# Altium PCB MAIN.PcbDoc (part 1 of 2)
Units mm, origin at the board's own origin, x right, y up, seen from the top; angles counter-clockwise.
Board outline 40 x 35 mm, 2 copper layers (Top Layer, Bottom Layer); 40 components, 37 nets, 199 pads, 289 vias.
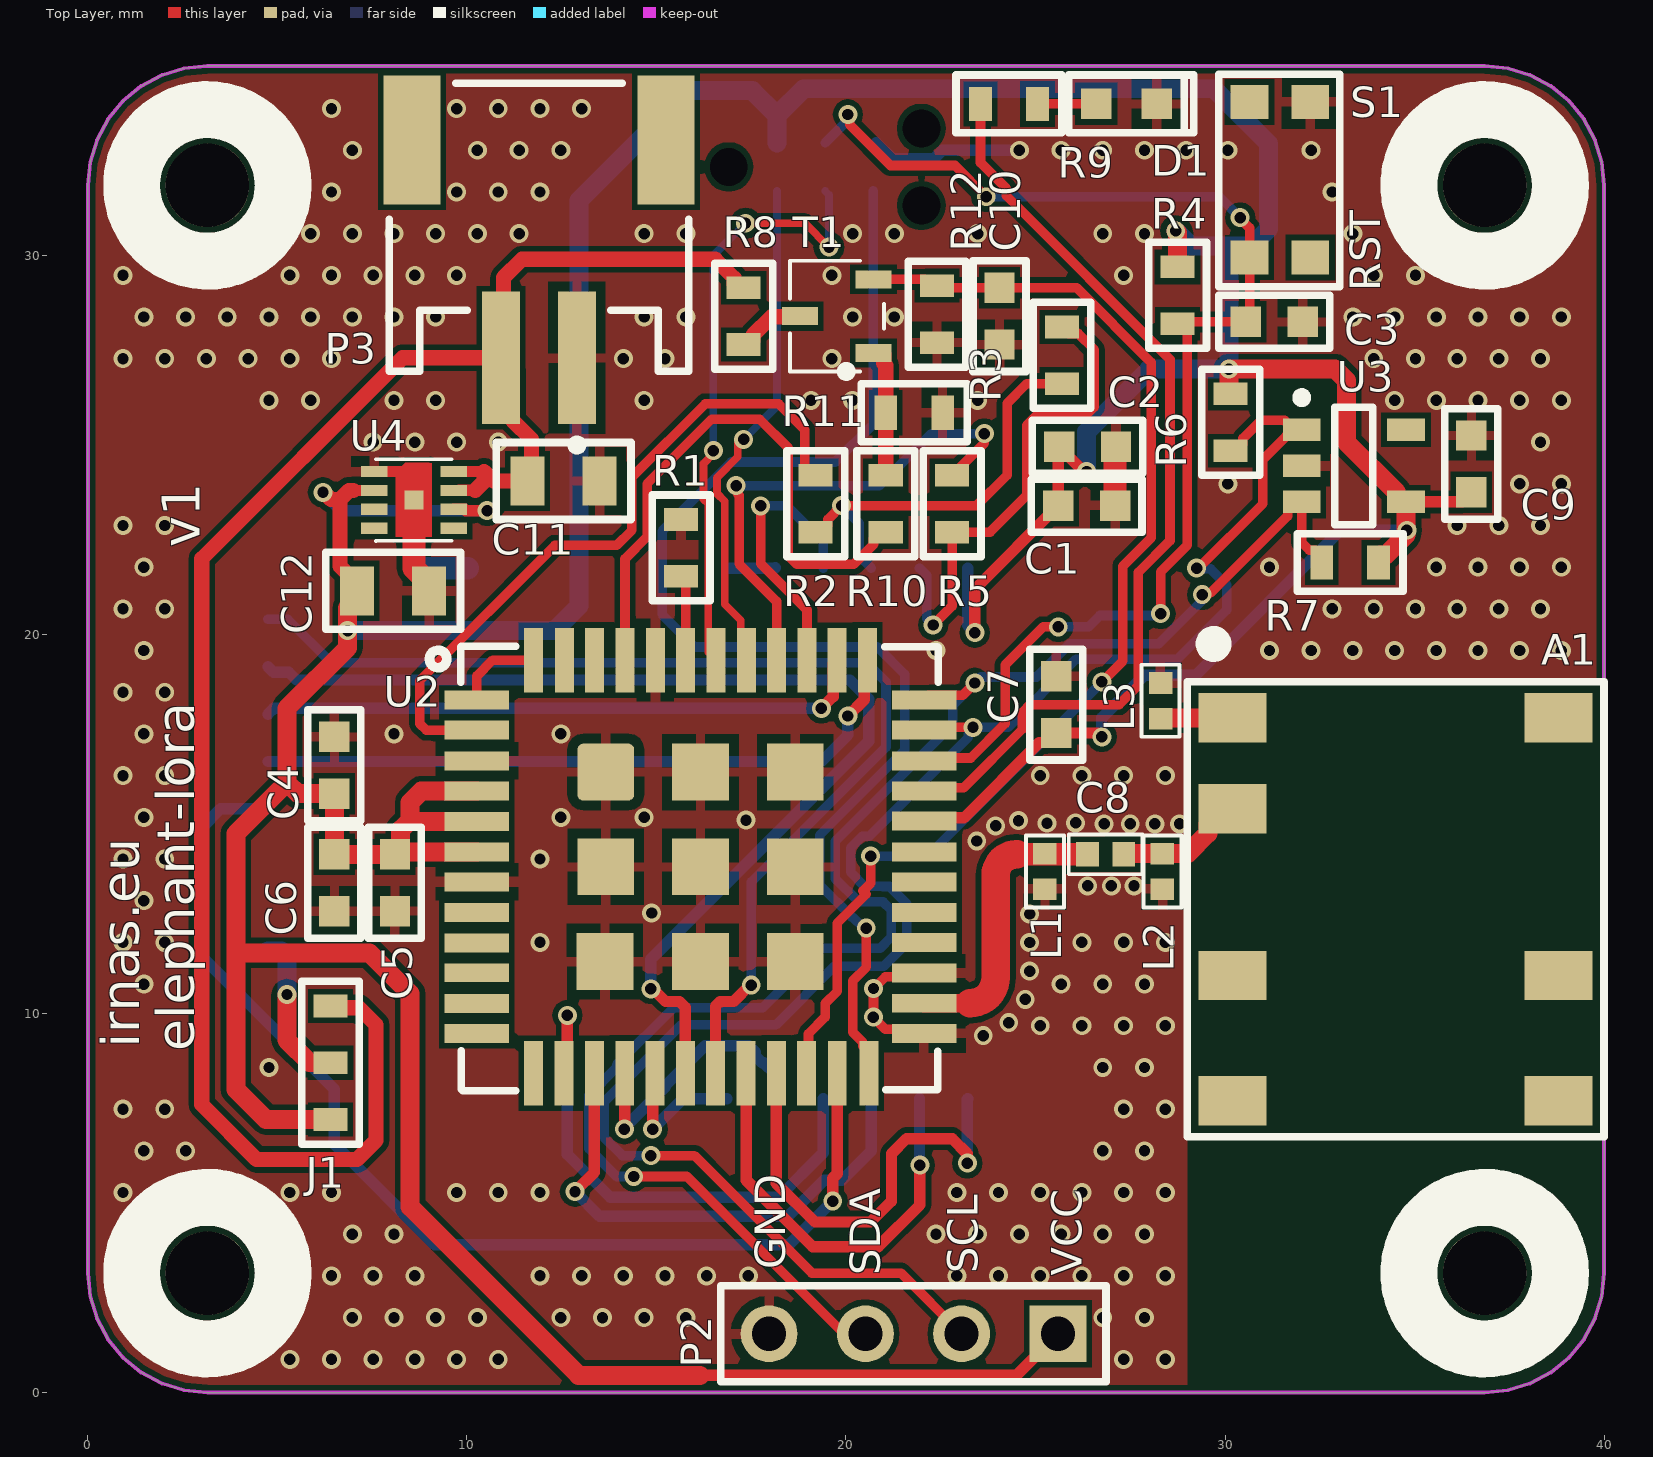
[diagram p0: Top Layer view]
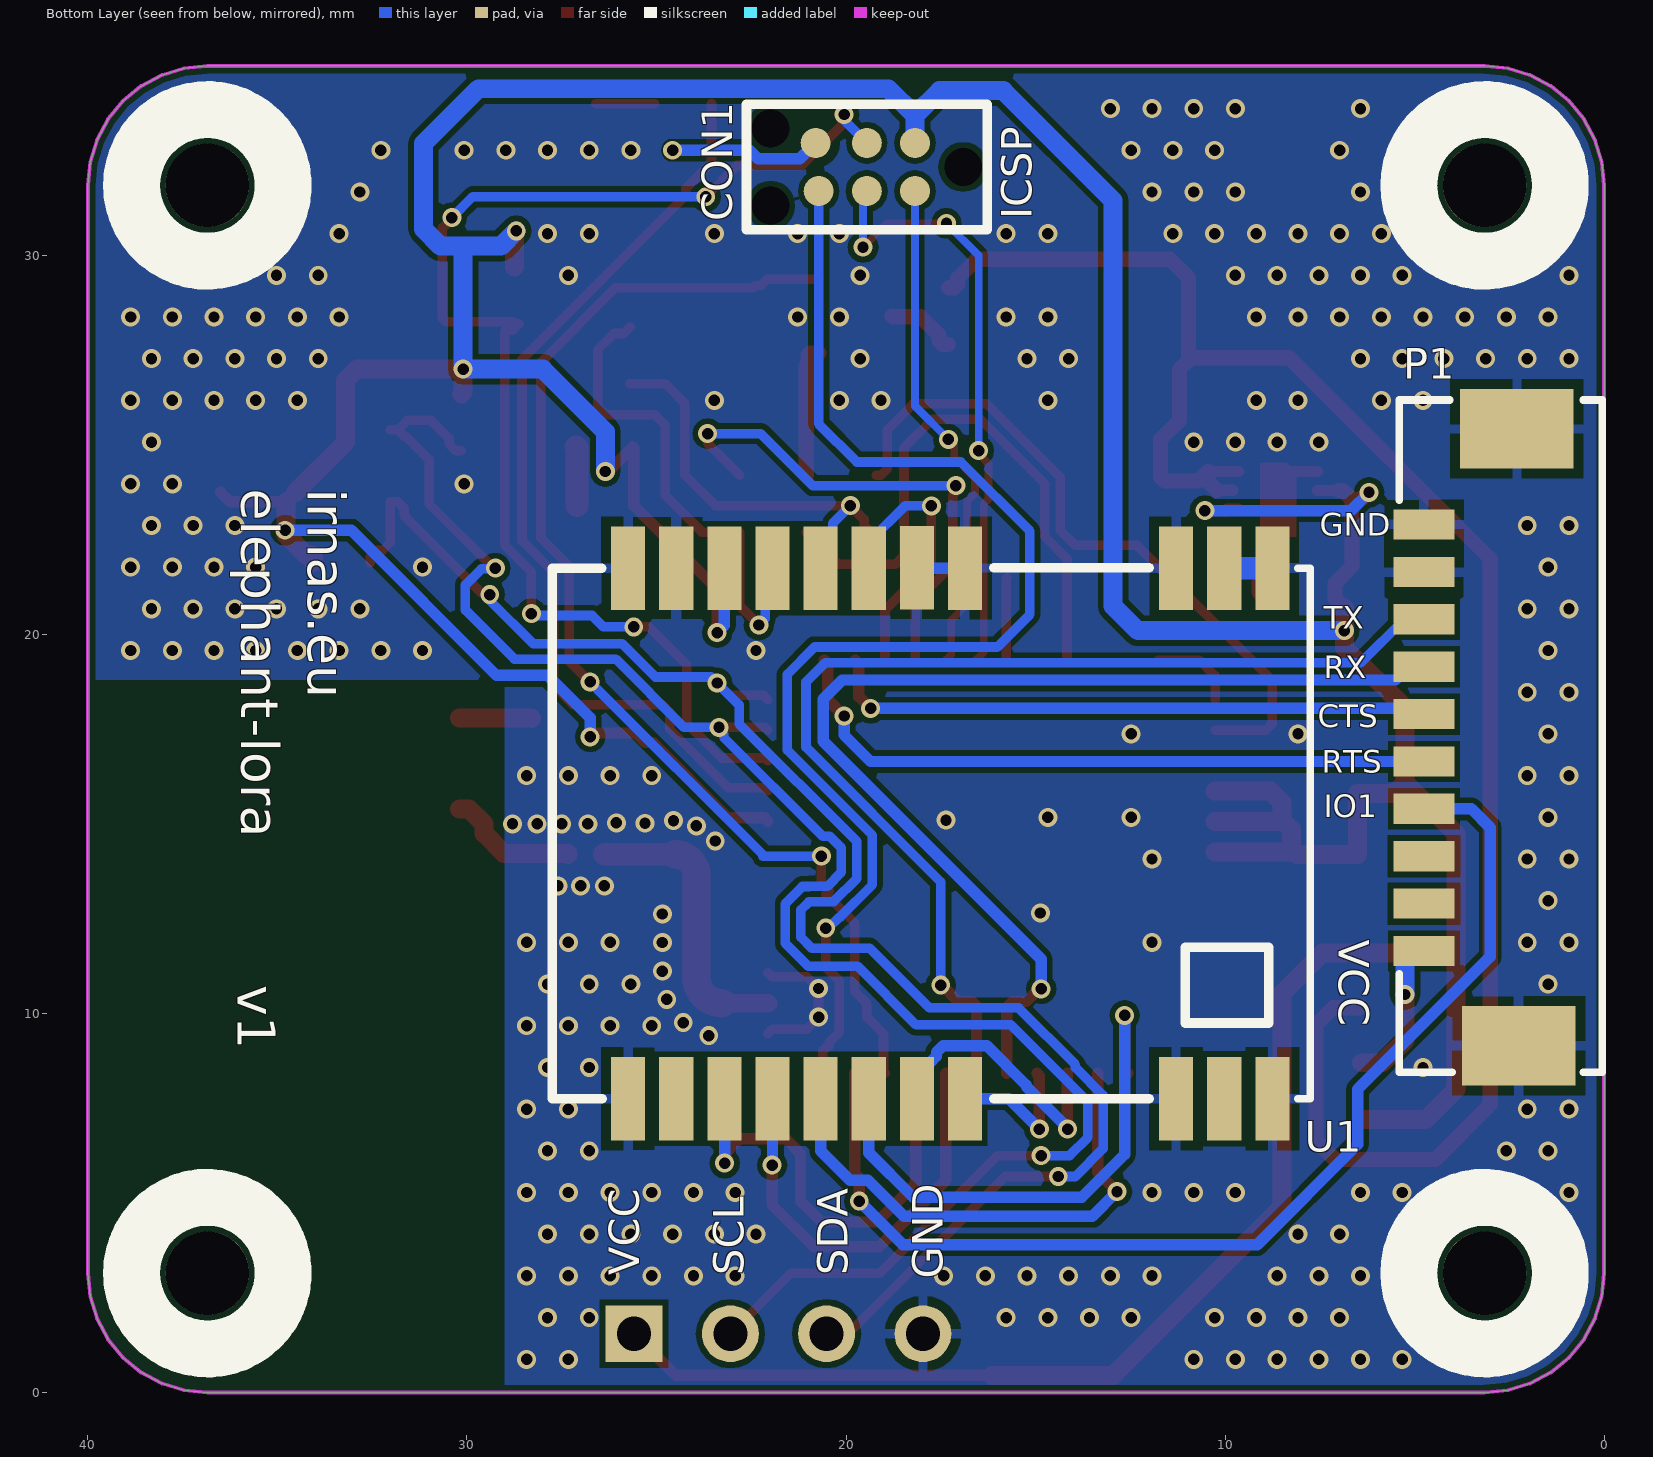
[diagram p1: Bottom Layer view, seen from below]

## Layer stack, top to bottom
Top Solder: solder mask 0.0102, Solder Resist, Dk 3.5
Top Layer: signal copper 0.0356
Dielectric 1: dielectric 0.32, FR-4, Dk 4.8
Bottom Layer: signal copper 0.0356
Bottom Solder: solder mask 0.0102, Solder Resist, Dk 3.5

## Board outline
40,31.852 39.94,32.466 39.76,33.057 39.469,33.601 39.078,34.078 38.601,34.469 38.057,34.76 37.466,34.939 36.852,35 3.148,35 2.534,34.939 1.943,34.76 1.399,34.469 0.922,34.078 0.531,33.601 0.24,33.057 0.06,32.466 0,31.852 0,3.148 0.06,2.534 0.24,1.943 0.531,1.399 0.922,0.922 1.399,0.53 1.943,0.239 2.534,0.06 3.148,0 36.852,0 37.466,0.06 38.057,0.239 38.601,0.53 39.078,0.922 39.469,1.399 39.76,1.943 39.94,2.534 40,3.148

## Design rules (kind name [scope] priority, off if disabled: settings)
Clearance Clearance_1 [InNamedPolygon('Top Layer-GND')] p1: gap=0.152 ignorepadtopadclearanceinfootprint=FALSE
Clearance [All] p2: gap=0.152 ignorepadtopadclearanceinfootprint=FALSE except(0.15: SMDPad-SMDPad)
ComponentClearance [All] p1: gap=0 collisioncheckmode=3 verticalgap=0 showdistances=FALSE
HoleSize [All] p1: absolutevalues=TRUE maxlimit=3 minlimit=0.3 maxpercent=80.000 minpercent=20.000
PolygonConnect [All] p1: thpad.connectstyle=Relief thpad.reliefconductorwidth=0.254 thpad.reliefentries=4 thpad.polygonreliefangle="90 Angle" thpad.airgapwidth=0.254 smdpad.connectstyle=Relief smdpad.reliefconductorwidth=0.254 smdpad.reliefentries=4 smdpad.polygonreliefangle="90 Angle" smdpad.airgapwidth=0.254 via.connectstyle=Direct via.reliefconductorwidth=0.254 via.reliefentries=4 via.polygonreliefangle="90 Angle" via.airgapwidth=0.254
RoutingVias [All] p1: holewidth=0.3 width=0.5 viastyle="Through Hole" minholewidth=0.3 minwidth=0.5 maxholewidth=0.3 maxwidth=0.5
SilkToSilkClearance [All] p1: silktosilkclearance=0
SilkToSolderMaskClearance [IsPad] p1: minsilkscreentomaskgap=0.152 clearancetoexposedcopper=TRUE
SolderMaskExpansion [All] p1: expansion=0.102
Width [All] p1: maxlimit=3 minlimit=0.203 preferedwidth=0.203
26 further rules are at their usual default settings.

## Components (designator, comment, footprint, x,y, rotation, side; value= is the part's Value field where it differs from the comment)
A1 "SR42I010-R" LORA_PCB_ANTENNA 34.5,12.75 r270 top
C1 "100nF" CAP0603 26.35,23.4 r180 top
C2 "1uF" CAP0603 26.374,24.95 r180 top
C3 "100nF" CAP0603 31.3,28.25 r180 top
C4 "10uF" CAP0603 6.5,16.55 r270 top
C5 "1uF" CAP0603 8.1,13.45 r90 top
C6 "100nF" CAP0603 6.5,13.45 r90 top
C7 "1uF" CAP0603 25.55,18.15 r270 top
C8 "2.2uF 6V3" CAP0402 26.85,14.2 r0 top
C9 "100nF" CAP0603 36.5,24.5 r270 top
C10 "10nF" CAP0603 24.05,28.4 r90 top
C11 "2.2uF" CAP0805 12.55,24.05 r180 top
C12 "2.2uF" CAP0805 8.05,21.15 r180 top
CON1 "Tag connect" TC2030-IDC-NL 16.91,32.335 r0 bottom
D1 "LED RED" LED0603 27.4,34 r180 top
J1 "Selector" Selector 6.4,8.7 r270 top
L1 "4.3nH" IND0402 25.25,13.75 r90 top
L2 "4.3nH" IND0402 28.35,13.75 r90 top
L3 "4.3nH" IND0402 28.3,18.25 r270 top
P1 "53261-1071" 53261-1071 3.5,17.287 r90 bottom
P2 "Header 4" HDR1X4 25.59,1.55 r180 top
P3 "S2B-PH-SM4-TB(LF)(SN)" "JST- S2B-PH-SM4-TB(LF)(SN)-2_V" 11.9,30.75 r180 top
R1 "10k" RES0603 15.65,22.284 r90 top
R2 "0R" RES0603 19.2,23.45 r90 top
R3 "0R" RES0603 25.7,27.366 r90 top
R4 "10k" RES0603 28.75,28.95 r90 top
R5 "0R" RES0603 22.8,23.45 r90 top
R6 "4k7" RES0603 30.15,25.6 r90 top
R7 "4k7" RES0603 33.3,21.9 r0 top
R8 "75k" RES0603 17.3,28.4 r90 top
R9 "100R" RES0603 24.3,34 r0 top
R10 "100R" RES0603 21.05,23.45 r90 top
R11 "100k" RES0603 21.8,25.85 r180 top
R12 "100k" RES0603 22.4,28.45 r90 top
S1 "KMR221NGLFS" SW 31.28,31.918 r90 top
T1 "2N7002ET1G" SOT23-3AL 19.75,28.4 r180 top value=BSS123
U1 "E22-900M22S" E22-900M22S 17.25,14.755 r90 bottom
U2 "CMWX1ZZABZ" "Lora Module ES0" 16.5,13.9 r0 top
U3 "24AA02E48T-I/OT" SOT95P280X145-5N 33.4,24.45 r0 top
U4 "MCP1810T" VDFN_2x2 8.6,23.55 r270 top

## Footprints (in the part's own frame and the unit in brackets; to place one, negate y for a bottom-side part, rotate by r counter-clockwise, add the part's x,y. Pads: shape width x height; smd on the part's side, far side on the other; paste and mask are expansions set on the pad)
53261-1071 [mm]
  rect 0.8x1.6 smd: 1(-5.637,1.25) 2(-4.387,1.25) 3(-3.137,1.25) 4(-1.887,1.25) 5(-0.637,1.25) 6(0.613,1.25) 7(1.863,1.25) 8(3.113,1.25) 9(4.363,1.25) 10(5.613,1.25)
  rect 2.1x3 smd: 11(-8.137,-1.25) 12(8.138,-1.2)
  silkscreen extent -8.84,-3.45 8.9,1.9, body extent -8.82,-3.37 8.83,1.83, height 3.41
CAP0402 [mm] "Chip Capacitor, 2-Leads, Body 1.00x0.50mm, IPC Medium Density"
  rect 0.6x0.64 smd: 1(-0.48,0) 2(0.48,0)
  silkscreen extent -0.97,-0.53 0.97,0.53, body extent -0.55,-0.3 0.55,0.3, height 0.45
CAP0603 [mm]
  rect 0.8x0.8 smd: 1(-0.75,0) 2(0.75,0)
  silkscreen extent -1.46,-0.7 1.46,0.7, body extent -0.8,-0.4 0.8,0.4, height 0.9
CAP0805 [mm]
  rect 0.9x1.3 smd: 1(-0.95,0) 2(0.95,0)
  silkscreen extent -1.78,-1.02 1.78,1.02, body extent -1,-0.6 1,0.6, height 1.5
E22-900M22S [mm]
  rect 2.2x0.9 smd: 1(6.995,-8.5) 2(6.995,-7.23) 3(6.995,-5.96) 4(6.995,-0.39) 5(7.005,0.88) 6(6.995,2.15) 7(6.995,3.42) 8(6.995,4.69) 9(6.995,5.96) 10(6.995,7.23) 11(6.995,8.5) 12(-7.005,8.5) 13(-7.005,7.23) 14(-7.005,5.96) 15(-7.005,4.69) 16(-7.005,3.42) 17(-7.005,2.15) 18(-7.005,0.88) 19(-7.005,-0.39) 20(-7.005,-5.96) 21(-7.005,-7.23) 22(-7.005,-8.5)
  silkscreen extent -7,-9.5 7.01,10.5, body extent -7,-9.5 7,10.4, height 3.87
HDR1X4 [mm] "Connector; Header; 4 Position"
  rect 1.5x1.5 hole 0.9: 1(0,0)
  round 1.5 hole 0.9: 2(2.54,0) 3(5.08,0) 4(7.62,0)
  silkscreen extent -1.27,-1.27 8.89,1.27
IND0402 [mm] "Chip Inductor, 2-Leads, Body 1.00x0.50mm, IPC Medium Density"
  rect 0.57x0.62 smd: 1(-0.47,0) 2(0.47,0)
  silkscreen extent -0.95,-0.5 0.95,0.5, body extent -0.52,-0.27 0.53,0.28, height 0.55
"JST- S2B-PH-SM4-TB(LF)(SN)-2_V" [mm] "SMD, 2-Leads, Body 7.9x7.6mm, Pitch 2mm"
  rect 1x3.5 smd: 1(-1,3.45) 2(1,3.45)
  rect 1.5x3.4 smd: MP1(-3.35,-2.3) MP2(3.35,-2.3)
  silkscreen extent -3.95,-3.8 3.95,5.87, body extent -3.95,-3.8 3.95,4.8, height 5.6
LED0603 [mm]
  rect 0.8x0.8 smd: 1(-0.8,0) 2(0.8,0)
  silkscreen extent -1.78,-0.76 1.52,0.76, body extent -0.85,-0.4 0.85,0.4, height 0.66
"Lora Module ES0" [mm]
  rect 1.7x0.5 smd paste-5: 1(-6.24,4.375) 2(-6.24,3.575) 3(-6.24,2.765) 4(-6.24,1.965) 5(-6.24,1.165) 6(-6.24,0.365) 7(-6.24,-0.425) 8(-6.24,-1.235) 9(-6.24,-2.035) 10(-6.24,-2.825) 11(-6.24,-3.635) 12(-6.24,-4.425) 25(5.562,-4.43) 26(5.562,-3.629) 27(5.562,-2.827) 28(5.562,-2.03) 29(5.562,-1.23) 30(5.562,-0.43) 31(5.56,0.365) 32(5.56,1.175) 33(5.56,1.975) 34(5.56,2.765) 35(5.56,3.575) 36(5.56,4.375)
  rect 0.5x1.7 smd paste-5: 13(-4.74,-5.48) 14(-3.938,-5.48) 15(-3.138,-5.48) 16(-2.338,-5.48) 17(-1.538,-5.48) 18(-0.738,-5.48) 19(0.062,-5.48) 20(0.862,-5.479) 21(1.662,-5.479) 22(2.462,-5.48) 23(3.269,-5.48) 24(4.11,-5.48) 37(4.07,5.425) 38(3.26,5.425) 39(2.47,5.425) 40(1.67,5.425) 41(0.87,5.425) 42(0.07,5.425) 43(-0.73,5.425) 44(-1.53,5.425) 45(-2.33,5.425) 46(-3.13,5.425) 47(-3.93,5.425) 48(-4.74,5.425)
  rrect20% 1.5x1.5 smd: 49(-2.838,2.47)
  rect 1.5x1.5 smd: 50(-0.338,2.47) 51(2.162,2.47) 52(-2.838,-0.03) 53(-0.338,-0.03) 54(2.162,-0.03) 55(-2.863,-2.53) 56(-0.338,-2.53) 57(2.162,-2.53)
  silkscreen extent -7.49,-5.94 5.93,5.78, body extent -6.63,-5.88 5.87,5.72, height 1.76
LORA_PCB_ANTENNA [mm]
  rect 1.3x1.8 smd: 1(-5.05,-4.3) 2(-2.65,-4.3) 3(1.75,-4.3) 4(5.05,-4.3) 5(5.05,4.3) 6(1.75,4.3) 7(-5.05,4.3)
  silkscreen extent -7.22,-5.5 6,5.5, body extent -6,-5.5 6,5.5, height 1.7
RES0603 [mm]
  rect 0.6x0.9 smd: 1(-0.75,0) 2(0.75,0)
  silkscreen extent -1.4,-0.76 1.4,0.76, body extent -0.8,-0.42 0.8,0.42, height 0.8
Selector [mm]
  rect 0.6x0.9 smd: 1(-1.5,0) 2(0,0) 3(1.5,0)
  silkscreen extent -2.15,-0.76 2.15,0.76, body extent -1.55,-0.42 0.05,0.42, height 0.8
SOT23-3AL [mm]
  rect 0.95x0.48 smd: 1(-0.97,0.97) 2(-0.97,-0.97) 3(0.97,0)
  silkscreen extent -1.25,-1.46 1.23,1.58, body extent -1.25,-1.46 1.23,1.46, height 0.95
SOT95P280X145-5N [mm] "SOT23, 5-Leads, Body 2.90x2.80mm, Pitch 0.95mm, IPC Medium Density"
  rect 1x0.6 smd: 1(-1.375,0.95) 2(-1.375,0) 3(-1.375,-0.95) 4(1.375,-0.95) 5(1.375,0.95)
  silkscreen extent -1.5,-1.55 0.5,1.92, body extent -1.5,-1.52 1.5,1.53, height 1.45
SW [mm]
  rect 0.9x1 smd: 1(-1.968,0.63) 2(-1.968,-0.97) 3(2.132,0.63) 4(2.132,-0.97)
  silkscreen extent -2.74,-1.75 2.86,1.45, body extent -2.22,-1.66 2.38,1.34, height 2.1
TC2030-IDC-NL [mm] "Tag-Connect 6-Pin with No Legs (PN# TC2030-IDC-NL)"
  round 0.9 hole 0.995 unplated: 0(0,0) 0(5.08,-1.016) 0(5.08,1.016)
  round 0.79 smd paste-0.39: 1(1.27,-0.635) 2(1.27,0.635) 3(2.54,-0.635) 4(2.54,0.635) 5(3.89,-0.635) 6(3.81,0.635)
  silkscreen extent -0.64,-1.65 5.71,1.65
VDFN_2x2 [mm]
  rect 0.5x0.5 smd: 0(0,0)
  rect 0.3x0.7 smd: 1(-0.75,-1.05) 2(-0.25,-1.05) 3(0.25,-1.05) 4(0.75,-1.05) 5(0.75,1.05) 6(0.25,1.05) 7(-0.25,1.05) 8(-0.75,1.05)
  Top Layer region: 0.975,0.4 0.975,0.475 -0.975,0.475 -0.975,0.401 -0.975,-0.225 -0.725,-0.475 0.975,-0.475
  silkscreen extent -1.07,-1 1.08,1, body extent -1,-1 1,1.01, height 0.86

## Part data
A1: "Antenna SMD -4dBi Gain 870MHz/928MHz Automotive 7-Pin SMD T/R", Manufacturer=Antenova, Supplier Part Number 1=237-SR42I010-R, Manufacturer Part Number=SR42I010-R, Pricing 1="1 = 2.36000, 10 = 1.90000, 50 = 1.90000, 100 = 1.52000, 1000 = 1.07000, 10000 = 0.95900 (USD)", Stock 1=3154, Supplier 1=Mouser
C1 C3 C6 C9: library part "C - 100nF", "MURATA - GRM188R71C104KA01J - CAP, MLCC, X7R, 0.1UF, 16V, 0603", Capacitance=0.1, Capacitance Tolerance="± 10%", Ceramic Capacitor Case="0603 [1608 Metric]", Dielectric Characteristic=X7, IRNAS Part No.=I-200005, Manufacturer=MURATA, Manufacturer Part Number=GRM188R71C104KA01J, Operating Temperature Max=125, Operating Temperature Min=-55, Supplier Part Number 1=2688519, Voltage Rating=16, Automotive Qualification Standard=-, ComponentLink1Description=http://www.farnell.com/datasheets/2189124.pdf, ComponentLink1URL=http://www.farnell.com/datasheets/2189124.pdf, MSL="MSL 1 - Unlimited", Packaging="Cut Tape", Pricing 1="10=0.0145, 100=0.0126, 500=0.0081, 2500=0.0059, 5000=0.0052, 10000=0.0046, 50000=0.0036, 100000=0.0035 (GBP)", Product Range="GRM Series", RoHS=YES, Stock 1=18297, Supplier 1=Farnell, SVHC="No SVHC (20-Jun-2016"
C2 C5 C7: library part "C - 1uF", "MURATA - GRM188R61H105KAALD - CAP, MLCC, X5R, 1UF, 50V, 0603", Capacitance=1, Capacitance Tolerance="± 10%", Capacitor Terminals="SMD<!--FANDB--><div class=\"features-and-benefits-container\"><div class=\"features-and-benefits-description\"><span class=\"features-benefits-value\">The Murata GRM series capacitors are Multilayer Ceramic Chip Capacitors (MLCC) used for general purpose applications. These MLCC capacitors are classified into temperature compensating and high dielectric constant types depending on the change in electrostatic capacitance due to change in temperature. The temperature compensating capacitors feature a small rate of change in electrostatic capacitance as the temperature changes and are used for applications such as filters and high frequency circuit matching. The high dielectric constant capacitors use materials with a high dielectric constant and feature a large electrostatic capacitance. Typical applications are power supply decoupling and smoothing circuits.</span></div><div class=\"features-and-benefits-list\"><ul class=\"features-and-benefits-list-list\"><li class=\"features-and-benefits-list-item\">Large capacity and small size in a multilayer structure</li><li class=\"features-and-benefits-list-item\">Capacitance value ranging from 0.1pF to 220?F</li><li class=\"features-and-benefits-list-item\">Tin plated external electrodes, excellent solderability</li><li class=\"features-and-benefits-list-item\">Provides good high frequency characteristics</li><li class=\"features-and-benefits-list-item\">Excellent pulse response</li><li class=\"features-and-benefits-list-item\">High reliability</li><li class=\"features-and-benefits-list-item\">Capacitor size varies from 0.4×0.2mm to 5.7×5.0mm</li><li class=\"features-and-benefits-list-item\">Rated voltage of 2.5VDC to 3.15", Ceramic Capacitor Case="0603 [1608 Metric]", Dielectric Characteristic=X5, IRNAS Part No.=I-200006, Manufacturer=MURATA, Manufacturer Part Number=GRM188R61H105KAALD, Operating Temperature Max=85, Operating Temperature Min=-55, Supplier Part Number 1=1845736, Voltage Rating=50, Automotive Qualification Standard=-, Capacitance Tolerance ±="± 10%", ComponentLink1Description=http://www.farnell.com/datasheets/2048611.pdf, ComponentLink1URL=http://www.farnell.com/datasheets/2048611.pdf, MSL=-, Packaging="Cut Tape", Pricing 1="10=0.093, 100=0.062, 500=0.0507, 1000=0.0465, 2000=0.0429, 4000=0.0399, 20000=0.0372, 40000=0.0365 (GBP)", Product Range="GRM Series", RoHS=YES, Stock 1=62682, Supplier 1=Farnell, SVHC="No SVHC (17-Dec-2015)"
C4: "10uf/0603/20%", Manufacturer=KEMET, Manufacturer Part Number=C0603C106M8PACTU, Supplier Part Number 1=2456110, Pricing 1="10=0.555, 100=0.315, 500=0.238, 1000=0.2, 2000=0.174, 4000=0.143, 20000=0.123 (GBP)", Stock 1=0, Supplier 1=Farnell
C8: library part "C - 2.2uF/6V3/0402", "CAP CER 2.2UF 6.3V 20% X5R 0402", Capacitance=2.2uF, Case/Package=0402, Case Code (Metric)=1005, Dielectric=X5R, IRNAS Part No.=/, Manufacturer=Murata, Manufacturer Part Number=GRM155R60J225ME15D, Max Operating Temperature=85°C, Min Operating Temperature=-55°C, Package Quantity=10000, Supplier Part Number 1=2362088, Tolerance=20%, Voltage=6.3V, Case Code (Imperial)=0402, ComponentLink1Description=https://datasheet.ciiva.com/29149/450128-da-01-de-vs-kondens-grm155-r60j-225me15d-29149006.pdf, ComponentLink1URL=https://datasheet.ciiva.com/29149/450128-da-01-de-vs-kondens-grm155-r60j-225me15d-29149006.pdf, ComponentLink2Description=https://datasheet.ciiva.com/46418/1754686-46418042.pdf, ComponentLink2URL=https://datasheet.ciiva.com/46418/1754686-46418042.pdf, ComponentLink3Description=https://datasheet.ciiva.com/17454/c02e-17454956.pdf, ComponentLink3URL=https://datasheet.ciiva.com/17454/c02e-17454956.pdf, ComponentLink4Description=https://datasheet.ciiva.com/235/partnumbering-e-01-235009.pdf, ComponentLink4URL=https://datasheet.ciiva.com/235/partnumbering-e-01-235009.pdf, ComponentLink5Description=https://datasheet.ciiva.com/2989/c02e-2989361.pdf, ComponentLink5URL=https://datasheet.ciiva.com/2989/c02e-2989361.pdf, ComponentLink6Description=https://datasheet.ciiva.com/235/partnumbering-e-01-235010.pdf, ComponentLink6URL=https://datasheet.ciiva.com/235/partnumbering-e-01-235010.pdf, ComponentLink7Description=https://datasheet.ciiva.com/235/partnumbering-e-01-235011.pdf, ComponentLink7URL=https://datasheet.ciiva.com/235/partnumbering-e-01-235011.pdf, Depth=0.5mm, Height=0.5mm, Lead Free="Lead Free", Length=1mm, Material=Ceramic, Mount="Surface Mount", Packaging="Tape and Reel", Pricing 1="10=0.118, 100=0.0494, 500=0.031, 2500=0.0213, 5000=0.0163 (EUR)", Radiation Hardening=No, REACH SVHC="No SVHC", Stock 1=0, Supplier 1=Farnell, Termination=SMD/SMT, Thickness=0.022inch, Voltage Rating=6.3V, Voltage Rating (DC)=6.3V, Width=0.02inch
C10: library part "C - 10nF", "KEMET - C0603X103K5RECAUTO - CAP, MLCC, AEC-Q200, X7R, 0.01UF, 50V", IRNAS Part No.=I-200004, Manufacturer="TDK EPCOS", Manufacturer Part Number=C0603X103K5RECAUTO, Supplier Part Number 1=2760492, ComponentLink1Description=http://www.farnell.com/datasheets/2290180.pdf, ComponentLink1URL=http://www.farnell.com/datasheets/2290180.pdf, Pricing 1="10=0.133, 100=0.0731, 500=0.055, 1000=0.0465, 2000=0.0408, 4000=0.0336, 20000=0.0295 (GBP)", Stock 1=307350, Supplier 1=Farnell
C11 C12: library part "C - 2.2uF/0805", "Multilayer Ceramic Capacitors MLCC - SMD/SMT 2.2uF 25V X7R 10%", Case/Package=0805, Case Code (Metric)=2012, Dielectric=X7R, IRNAS Part No.=/, Manufacturer=Yageo, Manufacturer Part Number=CC0805KKX7R8BB225, Max Operating Temperature=125°C, Min Operating Temperature=-55°C, Supplier Part Number 1=1458904, Tolerance=10%, Voltage Rating=25V, Capacitance=2.2uF, Case Code (Imperial)=0805, ComponentLink1Description=https://datasheet.ciiva.com/7009/775840-7009706.pdf, ComponentLink1URL=https://datasheet.ciiva.com/7009/775840-7009706.pdf, Composition=Ceramic, Depth=1.25mm, Halogen Free="Halogen Free", Height=0.3mm, Lead Free="Lead Free", Length=2mm, Mount="Surface Mount", Number of Pins=2, Packaging="Tape and Reel", Pricing 1="5=0.269, 50=0.163, 250=0.109, 500=0.0929, 1500=0.0722, 3000=0.0594, 15000=0.05 (GBP)", Radiation Hardening=No, REACH SVHC=Unknown, Stock 1=0, Supplier 1=Farnell, Termination=SMD/SMT, Thickness=0.057inch, Voltage Rating (DC)=25V, Width=1.25mm
CON1: library part "tag connecot 6 pin"
D1: library part "LED - LED RED", "BROADCOM LIMITED - HSMS-C190 - LED, RED, 10MCD, 626NM", Forward Current If=20, Forward Voltage=2.1, LED Colour=Red, Manufacturer="BROADCOM LIMITED", Manufacturer Part Number=HSMS-C190, Supplier Part Number 1=2497356, Automotive Qualification Standard=-, Bulb Size=-, ComponentLink1Description=http://www.farnell.com/datasheets/313031.pdf, ComponentLink1URL=http://www.farnell.com/datasheets/313031.pdf, ComponentLink2Description=http://www.farnell.com/datasheets/1681524.pdf, ComponentLink2URL=http://www.farnell.com/datasheets/1681524.pdf, ComponentLink3Description=http://www.farnell.com/datasheets/2165483.pdf, ComponentLink3URL=http://www.farnell.com/datasheets/2165483.pdf, LED Mounting=SMD, Lens Shape=Rectangular, Luminous Intensity=10, MSL=-, Packaging="Cut Tape", Pricing 1="1=0.361, 10=0.256, 50=0.235, 100=0.106, 200=0.101 (GBP)", Product Range=-, RoHS=YES, Stock 1=7534, Supplier 1=Farnell, SVHC="No SVHC (17-Dec-2015)<!--FANDB--><div class=\"features-and-benefits-container\"><div class=\"features-and-benefits-description\"><span class=\"features-benefits-value\">The HSMS-C190 is a HER SMD Chip LED with untinted/diffused lens, made of GaP. It is designed in an industry standard package 1.6 x 0.8mm footprint with 0.8mm profile. It is compatible with IR reflow solder processes. The small size and wide viewing angle make this LED prime choices for backlighting applications and front panel illumination especially where space is a premium.</span></div><div class=\"features-and-benefits-list\"><ul class=\"features-and-benefits-list-list\"><li class=\"features-and-benefits-list-item\">Small size</li><li class=\"features-and-benefits-list-item\">Industry standard footprint</li><li class=\"features-and-benefits-list-item\">Compatible with IR solder</li><li class=\"features-and-benefits-list-item\">Diffused optics</li><li class=\"features-and-benefits-list-item\">-40 to 85", Viewing Angle=170°, Wavelength Typ=626
L1 L2: library part "L - 4.3nH/0402", "Inductor RF Chip Multi-Layer 4.3nH 0.3nH 100MHz 8Q-Factor Air 300mA 210mOhm DCR 0402 Paper T/R", Case/Package=0402, Case Code (Metric)=1005, Current=300mA, DC Resistance (DCR)=210mR, Inductance=4.3nh, IRNAS Part No.=/, Manufacturer=Murata, Manufacturer Part Number=LQG15HN4N3S02D, Max Operating Temperature=125°C, Min Operating Temperature=-55°C, Package Quantity=10000, Self Resonant Frequency=6GHz, Supplier Part Number 1=490-6563-1-ND, Test Frequency=100MHz, Case Code (Imperial)=0402, ComponentLink1Description=http://uk.rs-online.com/webdocs/0f10/0900766b80f10808.pdf?src-supplier=RSComponents, ComponentLink1URL=http://uk.rs-online.com/webdocs/0f10/0900766b80f10808.pdf?src-supplier=RSComponents, ComponentLink2Description=http://search.murata.co.jp/Ceramy/image/img/PDF/ENG/L0075S0083LQG15HN.pdf?src-supplier=Avnet, ComponentLink2URL=http://search.murata.co.jp/Ceramy/image/img/PDF/ENG/L0075S0083LQG15HN.pdf?src-supplier=Avnet, ComponentLink3Description=http://www.farnell.com/datasheets/66026.pdf?src-supplier=Element14, ComponentLink3URL=http://www.farnell.com/datasheets/66026.pdf?src-supplier=Element14, ComponentLink4Description=https://www.verical.com/server-webapp/html/getDatasheet?partID=31252&src-supplier=Verical, ComponentLink4URL=https://www.verical.com/server-webapp/html/getDatasheet?partID=31252&src-supplier=Verical, ComponentLink5Description=http://search.murata.co.jp/Ceramy/image/img/PDF/ENG/L0075S0083LQG15HN.pdf?src-supplier=Avnet+Europe, ComponentLink5URL=http://search.murata.co.jp/Ceramy/image/img/PDF/ENG/L0075S0083LQG15HN.pdf?src-supplier=Avnet+Europe, ComponentLink6Description=https://search.murata.co.jp/Ceramy/image/img/P02/partnumberingAT_LQ3E.pdf?src-supplier=Digi-Key, ComponentLink6URL=https://search.murata.co.jp/Ceramy/image/img/P02/partnumberingAT_LQ3E.pdf?src-supplier=Digi-Key, Core Material=Air, Current Rating=300mA, DC Current=300mA, Depth=0.55mm, Height=0.5mm, Height - Seated (Max)=0.022inch, Lead Free="Lead Free", Length=1.05mm, Max DC Current=300mA, Military Standard=Not, Mount="Surface Mount", Packaging="Tape and Reel", Pricing 1="1 = 0.10000, 10 = 0.06100, 100 = 0.04040, 500 = 0.03366, 1000 = 0.02827, 2500 = 0.02423 (USD)", Q Factor=8, Radiation Hardening=No, REACH SVHC="No SVHC", RoHS=Yes, Shielding=Unshielded, Stock 1=3502, Supplier 1=Digi-Key, Termination=SMD/SMT, Width=0.02inch
L3: library part 4.3nH/0402, "Inductor RF Chip Multi-Layer 4.3nH 0.3nH 100MHz 8Q-Factor Air 300mA 210mOhm DCR 0402 Paper T/R", Case/Package=0402, Case Code (Metric)=1005, Current=300mA, DC Resistance (DCR)=210mR, Inductance=4.3nh, Manufacturer=Murata, Manufacturer Part Number=LQG15HN4N3S02D, Max Operating Temperature=125°C, Min Operating Temperature=-55°C, Package Quantity=10000, Self Resonant Frequency=6GHz, Supplier Part Number 1=490-6563-1-ND, Test Frequency=100MHz, Case Code (Imperial)=0402, ComponentLink1Description=http://uk.rs-online.com/webdocs/0f10/0900766b80f10808.pdf?src-supplier=RSComponents, ComponentLink1URL=http://uk.rs-online.com/webdocs/0f10/0900766b80f10808.pdf?src-supplier=RSComponents, ComponentLink2Description=http://search.murata.co.jp/Ceramy/image/img/PDF/ENG/L0075S0083LQG15HN.pdf?src-supplier=Avnet, ComponentLink2URL=http://search.murata.co.jp/Ceramy/image/img/PDF/ENG/L0075S0083LQG15HN.pdf?src-supplier=Avnet, ComponentLink3Description=http://www.farnell.com/datasheets/66026.pdf?src-supplier=Element14, ComponentLink3URL=http://www.farnell.com/datasheets/66026.pdf?src-supplier=Element14, ComponentLink4Description=https://www.verical.com/server-webapp/html/getDatasheet?partID=31252&src-supplier=Verical, ComponentLink4URL=https://www.verical.com/server-webapp/html/getDatasheet?partID=31252&src-supplier=Verical, ComponentLink5Description=http://search.murata.co.jp/Ceramy/image/img/PDF/ENG/L0075S0083LQG15HN.pdf?src-supplier=Avnet+Europe, ComponentLink5URL=http://search.murata.co.jp/Ceramy/image/img/PDF/ENG/L0075S0083LQG15HN.pdf?src-supplier=Avnet+Europe, ComponentLink6Description=https://search.murata.co.jp/Ceramy/image/img/P02/partnumberingAT_LQ3E.pdf?src-supplier=Digi-Key, ComponentLink6URL=https://search.murata.co.jp/Ceramy/image/img/P02/partnumberingAT_LQ3E.pdf?src-supplier=Digi-Key, Core Material=Air, Current Rating=300mA, DC Current=300mA, Depth=0.55mm, Height=0.5mm, Height - Seated (Max)=0.022inch, Lead Free="Lead Free", Length=1.05mm, Max DC Current=300mA, Military Standard=Not, Mount="Surface Mount", Packaging="Tape and Reel", Pricing 1="1 = 0.10000, 10 = 0.06100, 100 = 0.04040, 500 = 0.03366, 1000 = 0.02827, 2500 = 0.02423 (USD)", Q Factor=8, Radiation Hardening=No, REACH SVHC="No SVHC", RoHS=Yes, Shielding=Unshielded, Stock 1=3502, Supplier 1=Digi-Key, Termination=SMD/SMT, Width=0.02inch
P1: "Headers & Wire Housings 1.25MM HDR 10 CKT Right-Angle", Contact Resistance=20mR, Current Rating=1A, Flammability Rating="UL94 V-0", Insulation Resistance=100MR, Manufacturer=Molex, Max Operating Temperature=85°C, Min Operating Temperature=-40°C, Package Quantity=1000, Supplier Part Number 1=WM7628CT-ND, Voltage Rating=125V, ComponentLink1Description=https://datasheet.ciiva.com/7167/1626154-7167504.pdf?src-supplier=Newark, ComponentLink1URL=https://datasheet.ciiva.com/7167/1626154-7167504.pdf?src-supplier=Newark, ComponentLink2Description=https://datasheet.ciiva.com/5154/0532611071-pcb-headers-256967-5154836.pdf?src-supplier=Mouser, ComponentLink2URL=https://datasheet.ciiva.com/5154/0532611071-pcb-headers-256967-5154836.pdf?src-supplier=Mouser, ComponentLink3Description=https://datasheet.ciiva.com/7810/1597313-7810535.pdf?src-supplier=Element14, ComponentLink3URL=https://datasheet.ciiva.com/7810/1597313-7810535.pdf?src-supplier=Element14, ComponentLink4Description=https://datasheet.ciiva.com/27055/1932598-27055000.pdf?src-supplier=Jameco, ComponentLink4URL=https://datasheet.ciiva.com/27055/1932598-27055000.pdf?src-supplier=Jameco, ComponentLink5Description=https://datasheet.ciiva.com/11747/0900766b8078fc91-11747290.pdf?src-supplier=RSComponents, ComponentLink5URL=https://datasheet.ciiva.com/11747/0900766b8078fc91-11747290.pdf?src-supplier=RSComponents, ComponentLink6Description=https://datasheet.ciiva.com/46440/1808533-46440933.pdf?src-supplier=Element14, ComponentLink6URL=https://datasheet.ciiva.com/46440/1808533-46440933.pdf?src-supplier=Element14, ComponentLink7Description=https://datasheet.ciiva.com/46440/1626154-46440951.pdf?src-supplier=Element14, ComponentLink7URL=https://datasheet.ciiva.com/46440/1626154-46440951.pdf?src-supplier=Element14, Contact Material=Bronze, Contact Plating=Tin, Gender=Male, Glow Wire Compliant=Non-compliant, Housing Material=Thermoplastic, Lead Free="Lead Free", Manufacturer Part Number=53261-1071, Mount="Surface Mount", Number of Circuits=10, Number of Contacts=10, Number of Positions=10, Number of Rows=1, Orientation="Right Angle", Packaging="Tape and Reel", Pitch=1.25mm, Pricing 1="1 = 1.88000, 10 = 1.70200, 100 = 1.45900, 500 = 1.21584 (USD)", Radiation Hardening=No, REACH SVHC=Unknown, RoHS=Yes, Stock 1=12832, Supplier 1=Digi-Key, Termination=SMD/SMT, Voltage Rating (DC)=125V
P2: "Header, 4-Pin", LatestRevisionDate=17-Jul-2002, LatestRevisionNote="Re-released for DXP Platform.", Publisher="Altium Limited"
P3: library part CMP-1755-00001-1, "Male Header, Pitch 2 mm, 1 x 2 Position, Height 5.5 mm, -25 to 85 degC, RoHS, Tape and Reel", Colour=Black, Current Rating="3 A", Max Operating Temperature=105degC, Min Operating Temperature=-65degC, Package Quantity=100, ComponentLink1Description="Manufacturer URL", ComponentLink1URL=http://www.jst.com/home2.html, ComponentLink2Description=Datasheet, ComponentLink2URL=http://www.jst-mfg.com/product/pdf/eng/ePH.pdf, Contact Finish=Lead, Contact Material=Bronze, Contact Plating=Tin, DatasheetVersion=Dec-12, Height="8.13 mm", Lead Pitch="0.1 inch", Length="101.19 mm", Mount="Through Hole", PackageDescription="Male Header, Pitch 2 mm, 1 x 2 Position, Height 5.5 mm", PackageReference=S2B-PH-SM4-TB(LF)(SN)-2, Packaging=Bulk, Pins=40, Radiation Hardening=No, RoHSCompliant=True, Width="2.34 mm"
R1 R4: library part "R - 10k", "MULTICOMP - MCMR06X103 JTL - RES, CERAMIC, 10K, 5%, 0.1W, 0603", IRNAS Part No.=I-100008, Manufacturer=MULTICOMP, Manufacturer Part Number="MCMR06X103 JTL", Power Rating=100, Resistance=10, Resistance Tolerance="± 5%", Resistor Case Style="0603 [1608 Metric]", Resistor Element Material=Ceramic, Supplier Part Number 1=2073356, Temperature Coefficient="± 100", Voltage Rating=75, Automotive Qualification Standard="-<!--FANDB--><div class=\"features-and-benefits-container\"><div class=\"features-and-benefits-description\"><span class=\"features-benefits-value\">The Multicomp MCMR series resistors are automotive grade, anti sulphured thick film chip resistor. The resistance range includes E24 and E96 decade values from 1ohm to 10Mohm. These resistors are constructed on top of a high grade ceramic body.</span></div><div class=\"features-and-benefits-list\"><ul class=\"features-and-benefits-list-list\"><li class=\"features-and-benefits-list-item\">EIA 0402, 0603, 0805, 1206 chip sizes available</li><li class=\"features-and-benefits-list-item\">High reliability and stability</li><li class=\"features-and-benefits-list-item\">Automotive grade AEC-Q200 compliant</li><li class=\"features-and-benefits-list-item\">Complaint with (IEC 60068-1) 55/155/56 climatic category</li><li class=\"features-and-benefits-list-item\">Maximum operation voltage of 50V, 75V, 150V and 200V</li><li class=\"features-and-benefits-list-item\">Power rating of 62.5mW, 100mW, 125mW and 250mW</li><li class=\"features-and-benefits-list-item\">Available in ±1% and ±5% tolerance</li><li class=\"features-and-benefits-list-item\">Temperature coefficient (TCR) of +200ppm/°C, +100ppm/°C and -200ppm/°C to +400ppm/°C</li><li class=\"features-and-benefits-list-item\">Operating temperature range -55°C to 155", ComponentLink1Description=http://www.farnell.com/datasheets/1716707.pdf, ComponentLink1URL=http://www.farnell.com/datasheets/1716707.pdf, Packaging="Cut Tape", Pricing 1="10=0.0087, 100=0.0074, 500=0.0061, 1000=0.0048, 2500=0.0032, 5000=0.0024, 25000=0.0016, 50000=0.0013 (GBP)", Product Range="MCMR Series", RoHS=Y-EX, Stock 1=19791, Supplier 1=Farnell
R2 R3 R5: library part "R - 0R", "BOURNS - CR0603-J/-000ELF - RES, THICK FILM, 0R, 5%, 0.1W, 0603", IRNAS Part No.=I-100011, Manufacturer=BOURNS, Manufacturer Part Number=CR0603-J/-000ELF, Power Rating=100, Resistance=0, Resistance Tolerance="± 5%", Resistor Case Style="0603 [1608 Metric]", Resistor Element Material="Thick Film", Resistor Mounting="Surface Mount Device<!--FANDB--><div class=\"features-and-benefits-container\"><div class=\"features-and-benefits-description\"><span class=\"features-benefits-value\">The Bourns CR series are standard thick film chip resistors. These resistors provide flexibility of performance, space saving and low cost. The Resistance range includes E96 and E24 decade values from 1ohm to 10Mohm.</span></div><div class=\"features-and-benefits-list\"><ul class=\"features-and-benefits-list-list\"><li class=\"features-and-benefits-list-item\">0201, 0402, 0603, 0805, 1206, 1210, 2010, 2512 standard case sizes available</li><li class=\"features-and-benefits-list-item\">±1% and ±5% tolerance</li><li class=\"features-and-benefits-list-item\">±100ppm/°C, ±200ppm/°C and ±250ppm/°C TCR values available</li><li class=\"features-and-benefits-list-item\">Power rating selectable for 50mW, 63mW, 0.1W, 0.125W, 0.25W, 0.5W and 1W based on ordering</li><li class=\"features-and-benefits-list-item\">Jumpers are available for all size</li><li class=\"features-and-benefits-list-item\">3 layer termination process with nickel barrier prevents leaching & provides excellent solderability</li><li class=\"features-and-benefits-list-item\">Suitable for all type of soldering processes</li><li class=\"features-and-benefits-list-item\">Tight dimensional tolerances</li><li class=\"features-and-benefits-list-item\">Maximum working voltage depends on case size</li><li class=\"features-and-benefits-list-item\">Operating temperature of -55°C to +125°C(CR0201) and -55°C to +155", Supplier Part Number 1=2008343, Temperature Coefficient=-, Voltage Rating=50, Automotive Qualification Standard=-, ComponentLink1Description=http://www.bourns.com/engineering/CHPREZTR/cr0603.stp, ComponentLink1URL=http://www.bourns.com/engineering/CHPREZTR/cr0603.stp, ComponentLink2Description=http://www.farnell.com/datasheets/2178762.pdf, ComponentLink2URL=http://www.farnell.com/datasheets/2178762.pdf, MSL="MSL 1 - Unlimited", Packaging="Cut Tape", Pricing 1="10=0.0146, 250=0.0097, 1000=0.0073, 5000=0.0049, 12500=0.0042 (GBP)", Product Range="CR Series", RoHS=YES, Stock 1=58200, Supplier 1=Farnell, SVHC="No SVHC (17-Dec-2015)"
R6 R7: library part "R - 4k7", "MULTICOMP - MCMR06X4701FTL - RES, CERAMIC, 4K7, 1%, 0.1W, 0603", IRNAS Part No.=I-100003, Manufacturer=MULTICOMP, Manufacturer Part Number=MCMR06X4701FTL, Power Rating=100, Resistance=4.7, Resistance Tolerance="± 1%", Resistor Case Style="0603 [1608 Metric]", Resistor Element Material=Ceramic, Supplier Part Number 1=2073509, Temperature Coefficient="± 100", Voltage Rating=75, Automotive Qualification Standard=-, ComponentLink1Description=http://www.farnell.com/datasheets/1716707.pdf, ComponentLink1URL=http://www.farnell.com/datasheets/1716707.pdf, Packaging="Cut Tape", Pricing 1="10=0.0085, 100=0.0051, 500=0.0036, 1000=0.0028, 2500=0.0023 (GBP)", Product Range="MCMR Series", RoHS=Y-EX, Stock 1=218618, Supplier 1=Farnell, SVHC="No SVHC (12-Jan-2017)<!--FANDB--><div class=\"features-and-benefits-container\"><div class=\"features-and-benefits-description\"><span class=\"features-benefits-value\">The Multicomp MCMR series resistors are automotive grade, anti sulphured thick film chip resistor. The resistance range includes E24 and E96 decade values from 1ohm to 10Mohm. These resistors are constructed on top of a high grade ceramic body.</span></div><div class=\"features-and-benefits-list\"><ul class=\"features-and-benefits-list-list\"><li class=\"features-and-benefits-list-item\">EIA 0402, 0603, 0805, 1206 chip sizes available</li><li class=\"features-and-benefits-list-item\">High reliability and stability</li><li class=\"features-and-benefits-list-item\">Automotive grade AEC-Q200 compliant</li><li class=\"features-and-benefits-list-item\">Complaint with (IEC 60068-1) 55/155/56 climatic category</li><li class=\"features-and-benefits-list-item\">Maximum operation voltage of 50V, 75V, 150V and 200V</li><li class=\"features-and-benefits-list-item\">Power rating of 62.5mW, 100mW, 125mW and 250mW</li><li class=\"features-and-benefits-list-item\">Available in ±1% and ±5% tolerance</li><li class=\"features-and-benefits-list-item\">Temperature coefficient (TCR) of +200ppm/°C, +100ppm/°C and -200ppm/°C to +400ppm/°C</li><li class=\"features-and-benefits-list-item\">Operating temperature range -55°C to 155"
R8: library part "R - 75k", "MULTICOMP - MCSR06X7502FTL - RES, CERAMIC, 75K, 1%, 0.1W, 0603", IRNAS Part No.=/, Manufacturer=MULTICOMP, Manufacturer Part Number=MCSR06X7502FTL, Supplier Part Number 1=2074304, ComponentLink1Description=http://www.farnell.com/datasheets/1716711.pdf, ComponentLink1URL=http://www.farnell.com/datasheets/1716711.pdf, Pricing 1="10=0.0145, 100=0.0113, 500=0.008, 1000=0.0064, 2500=0.004, 5000=0.0031, 25000=0.0021, 50000=0.002 (GBP)", RoHS=Y-EX, Stock 1=1882, Supplier 1=Farnell
R9 R10: library part "R - 100R", "MULTICOMP - MC0063W06031100R - RES, THICK FILM, 100R, 1%, 0.063W, 0603", IRNAS Part No.=I-100009, Manufacturer=MULTICOMP, Manufacturer Part Number=MC0063W06031100R, Operating Temperature Max=155, Operating Temperature Min=-55, Operating Temperature Range="-55°C to +155", Power Rating=63, Resistance=100, Resistance Tolerance="± 1%", Resistor Case Style="0603 [1608 Metric]", Resistor Element Material="Thick Film", Resistor Mounting="Surface Mount Device", Supplier Part Number 1=9330364, Temperature Coeff. +=200, Temperature Coefficient="± 200", Tolerance +=1%, Voltage Rating=50, Voltage Rating V DC="50V<!--FANDB--><div class=\"features-and-benefits-container\"><div class=\"features-and-benefits-description\"><span class=\"features-benefits-value\">The Multicomp MC series current sense resistors are thick film chip resistors. The resistance range includes E96 and E24 decade values from 1ohm to 10Mohm.</span></div><div class=\"features-and-benefits-list\"><ul class=\"features-and-benefits-list-list\"><li class=\"features-and-benefits-list-item\">EIA 0402, 0603, 0805, 1206 chip sizes available</li><li class=\"features-and-benefits-list-item\">Small size and low weight</li><li class=\"features-and-benefits-list-item\">Suitable for both wave and reflow soldering</li><li class=\"features-and-benefits-list-item\">Reduction of assembly costs</li><li class=\"features-and-benefits-list-item\">Maximum working voltage of 50V(0402, 0603), 150V(0805), 200V(1206)</li><li class=\"features-and-benefits-list-item\">Available in ±1%, ±2% and ±5% tolerance</li><li class=\"features-and-benefits-list-item\">Power rating of 62.5mW, 100mW and 125mW</li><li class=\"features-and-benefits-list-item\">±400ppm/°C(1ohm to 10ohm), ±200ppm/°C(11ohm to 100ohm), ±100", Automotive Qualification Standard=-, ComponentLink1Description=http://www.farnell.com/datasheets/1788326.pdf, ComponentLink1URL=http://www.farnell.com/datasheets/1788326.pdf, ComponentLink2Description=http://www.farnell.com/cad/1561149.zip, ComponentLink2URL=http://www.farnell.com/cad/1561149.zip, ComponentLink3Description=http://www.farnell.com/datasheets/2289252.pdf, ComponentLink3URL=http://www.farnell.com/datasheets/2289252.pdf, External Depth=0.45, External Length / Height=1.6, External Width=0.8, No. of Pins=2, Packaging="Cut Tape", Pricing 1="10=0.0011, 100=0.001, 500=0.0009, 1000=0.0008, 2500=0.0007 (GBP)", Product Range="MC Series", Reel Quantity=5000, RoHS=Y-EX, Stock 1=78152, Supplier 1=Farnell, SVHC="No SVHC (12-Jan-2017)", Tape Width=8, Temperature Coeff. -=200, Tolerance -=1%
R11 R12: library part "R - 100k", "MULTICOMP - MCMR06X104 JTL - RES, CERAMIC, 100K, 5%, 0.1W, 0603", IRNAS Part No.=I-100007, Manufacturer=MULTICOMP, Manufacturer Part Number="MCMR06X104 JTL", Power Rating=100, Resistance Tolerance="± 5%", Resistor Case Style="0603 [1608 Metric]", Resistor Element Material=Ceramic, Resistor Mounting="Surface Mount Device<!--FANDB--><div class=\"features-and-benefits-container\"><div class=\"features-and-benefits-description\"><span class=\"features-benefits-value\">The Multicomp MCMR series resistors are automotive grade, anti sulphured thick film chip resistor. The resistance range includes E24 and E96 decade values from 1ohm to 10Mohm. These resistors are constructed on top of a high grade ceramic body.</span></div><div class=\"features-and-benefits-list\"><ul class=\"features-and-benefits-list-list\"><li class=\"features-and-benefits-list-item\">EIA 0402, 0603, 0805, 1206 chip sizes available</li><li class=\"features-and-benefits-list-item\">High reliability and stability</li><li class=\"features-and-benefits-list-item\">Automotive grade AEC-Q200 compliant</li><li class=\"features-and-benefits-list-item\">Complaint with (IEC 60068-1) 55/155/56 climatic category</li><li class=\"features-and-benefits-list-item\">Maximum operation voltage of 50V, 75V, 150V and 200V</li><li class=\"features-and-benefits-list-item\">Power rating of 62.5mW, 100mW, 125mW and 250mW</li><li class=\"features-and-benefits-list-item\">Available in ±1% and ±5% tolerance</li><li class=\"features-and-benefits-list-item\">Temperature coefficient (TCR) of +200ppm/°C, +100ppm/°C and -200ppm/°C to +400ppm/°C</li><li class=\"features-and-benefits-list-item\">Operating temperature range -55°C to 155", Supplier Part Number 1=2073357, Temperature Coefficient="± 100", Voltage Rating=75, Automotive Qualification Standard=-, ComponentLink1Description=http://www.farnell.com/datasheets/1716707.pdf, ComponentLink1URL=http://www.farnell.com/datasheets/1716707.pdf, Packaging="Cut Tape", Pricing 1="10=0.0109, 100=0.0085, 500=0.006, 1000=0.0048, 2500=0.004, 5000=0.003, 25000=0.002, 50000=0.0016 (GBP)", Product Range="MCMR Series", Resistance=100, RoHS=Y-EX, Stock 1=187, Supplier 1=Farnell
S1: "SWITCH TACTILE SPST-NO 0.05A 32V", Case/Package=SMD/SMT, Current Rating=50mA, Manufacturer="ITT C&K", Max Operating Temperature=85°C, Max Voltage Rating (DC)=32V, Min Operating Temperature=-40°C, Operating Force=2N, Package Quantity=1, Power Rating=1W, Supplier Part Number 1=2845727, Actuator Length=0.5mm, Actuator Type=Standard, ComponentLink1Description=https://www.ckswitches.com/media/1479/kmr2.pdf?src-supplier=Digi-Key, ComponentLink1URL=https://www.ckswitches.com/media/1479/kmr2.pdf?src-supplier=Digi-Key, ComponentLink2Description=http://www.ck-components.com/14414/kmr2_9aug12.pdf/?src-supplier=Avnet+Europe, ComponentLink2URL=http://www.ck-components.com/14414/kmr2_9aug12.pdf/?src-supplier=Avnet+Europe, ComponentLink3Description=http://www1.futureelectronics.com/doc/C%20-%20K%20COMPONENTS/KMR221NGLFS.pdf?src-supplier=Future+Electronics, ComponentLink3URL=http://www1.futureelectronics.com/doc/C%20-%20K%20COMPONENTS/KMR221NGLFS.pdf?src-supplier=Future+Electronics, Contact Material=Silver, Contact Plating=Silver, Depth=4.6mm, Illumination Type=Non-Illuminated, Lead Free="Lead Free", Length=2.8mm, Manufacturer Part Number=KMR221NGLFS, Max Current Rating=50mA, Mechanical Life=200000Cycles, Mount="Surface Mount", Orientation=Straight, Packaging="Tape and Reel", Pricing 1="10 = 0.29100, 500 = 0.27600, 1000 = 0.21800, 5000 = 0.18500, 10000 = 0.18100 (GBP)", Radiation Hardening=No, RoHS=Yes, Stock 1=3038, Supplier 1=Farnell, Switch Function=Off-Mom, Switch Travel=0.25mm, Termination="Gull Wing", Throw Configuration=SPST, Voltage Rating (DC)=32V
T1: library part "T_M - 2N7002ET1G", "MOSFET Transistor, N Channel, 310 mA, 60 V, 0.86 ohm, 10 V, 1 V", Supplier Part Number 1=2317616, Author="Ciril Golob", ComponentLink1Description=Datasheet, ComponentLink1URL=c:\ELRADSVN\Altium_Library\Libraries\Active\Datasheet\BSS123.pdf, ComponentLink2Description="Datasheet www", ComponentLink2URL=http://www.onsemi.com/pub/Collateral/BSS123-D.PDF, Date=11.07.2018, ELRAD Id sifra / ELRAD Id No=597778, FIT=0.44, Komp / Device=SMD, Opis / Description="MOSFET BSS123       /N-Channel", Supplier 1=Farnell, Supplier 2=Mouser, Supplier Part Number 2=863-2N7002ET1G, Velikost / Size=SOT23
U2: library part "MCU - CMWX1ZZABZ", "RF Module, FSK, OOK, LoRa, 4.8Kbps, 915MHz, -135.5dBm, 2.2V to 3.6V, I2C, SPI, UART, USB", Manufacturer=Murata, Manufacturer Part Number=CMWX1ZZABZ-091, Supplier Part Number 1=2802546, ComponentLink1Description=Datasheet, ComponentLink1URL=D:\altium\Altium_Library\Active\Datasheet\CMWX1ZZABZ.pdf, Pricing 1="1=11.7, 5=11.06, 10=9.94, 50=9.54, 100=9.14, 250=8.05 (GBP)", Stock 1=175, Supplier 1=Farnell, Supplier 2=Mouser, Supplier Part Number 2=81-CMWX1ZZABZ-091
U3: "MICROCHIP   24AA02E48T-I/OT   EEPROM, EUI-48 Node Identity, 2 Kbit, 2 BLK (128K x 8bit), 400 kHz, I2C, SOT-23, 5 Pins", Case/Package=SOT-23, Frequency=400kHz, Manufacturer=Microchip, Max Frequency=100kHz, Max Operating Temperature=85°C, Max Supply Voltage=5.5V, Min Operating Temperature=-40°C, Min Supply Voltage=1.7V, Nominal Supply Current=3mA, Operating Supply Voltage=5V, Package Quantity=3000, Supplier Part Number 1=1688855, Access Time=3500ns, ComponentLink1Description=http://www.farnell.com/datasheets/1725195.pdf?src-supplier=Element14, ComponentLink1URL=http://www.farnell.com/datasheets/1725195.pdf?src-supplier=Element14, ComponentLink2Description=http://www.farnell.com/datasheets/631538.pdf?src-supplier=Element14, ComponentLink2URL=http://www.farnell.com/datasheets/631538.pdf?src-supplier=Element14, ComponentLink3Description=http://ww1.microchip.com/downloads/en/DeviceDoc/22124D.pdf?src-supplier=Avnet+Europe, ComponentLink3URL=http://ww1.microchip.com/downloads/en/DeviceDoc/22124D.pdf?src-supplier=Avnet+Europe, ComponentLink4Description=http://www.microchip.com/mymicrochip/filehandler.aspx?ddocname=en538826&src-supplier=Future+Electronics, ComponentLink4URL=http://www.microchip.com/mymicrochip/filehandler.aspx?ddocname=en538826&src-supplier=Future+Electronics, ComponentLink5Description=http://www.produktinfo.conrad.com/datenblaetter/650000-674999/651228-da-01-en-EEPROM_24AA02E48T_I_OT_SOT_23_5_MCP.pdf?src-supplier=Conrad, ComponentLink5URL=http://www.produktinfo.conrad.com/datenblaetter/650000-674999/651228-da-01-en-EEPROM_24AA02E48T_I_OT_SOT_23_5_MCP.pdf?src-supplier=Conrad, Density=2Kb, Height=1.3mm, Interface=I2C,Serial, Lead Free="Lead Free", Length=3.1mm, Manufacturer Part Number=24AA02E48T-I/OT, Memory Size=2Kb, Memory Type=EEPROM, Mount="Surface Mount", Number of Pins=5, Packaging="Tape and Reel", Pricing 1="1 = 0.17600, 10 = 0.17100, 25 = 0.16400, 50 = 0.16000, 100 = 0.15600 (GBP)", Radiation Hardening=No, REACH SVHC="No SVHC", RoHS=Yes, Stock 1=13638, Supplier 1=Farnell, Termination=SMD/SMT, Width=1.8mm
U4: library part "V_LIN - MCP1810T", "LDO Voltage Regulator, Fixed, 2.5 V to 5.5 V in, 2.5 V/150 mA out, 380 mV drop", DC / DC Converter IC Case=TO-263, Input Voltage Max=45, Input Voltage Min=4.5, Manufacturer="ON SEMICONDUCTOR", Manufacturer Part Number=LM2596DSADJG, Operating Temperature Max=125, Output Current=3, Output Voltage Max=37, Output Voltage Min=1.23, Supplier Part Number 1=2678432, Switching Frequency=150, Automotive Qualification Standard=-, MSL="MSL 1 - Unlimited", No. of Outputs=1, No. of Pins=5, Packaging=Each, Pricing 1="1=1.98, 10=1.49, 100=1.19, 500=1.04, 1000=0.859, 2500=0.785 (GBP)", Product Range=-, RoHS=YES, Stock 1=342, Supplier 1=Farnell, Supplier 2=Mouser, Supplier 3=Digi-Key, Supplier Part Number 2=579-MCP1810T-25I/J8A, Supplier Part Number 3=MCP1810T-25I/J8ADKR-ND, SVHC="No SVHC (12-Jan-2017", Topology="Buck (Step Down)"
U1: ComponentLink1Description=Datasheet, ComponentLink1URL=http://www.ebyte.com/en/downpdf.aspx?id=437

## Free pads (board coordinates)
  round 2.2 hole 2.2 unplated: 1(3.15,3.15) 1(3.15,31.85) 1(36.85,3.15) 1(36.85,31.85)

## Via types
v1: diameter 0.5, hole 0.3, Top Layer to Bottom Layer, tented both sides, 289 vias

## Nets (pads, with @x,y where several pads share a name; then routed paths per layer and width w, separated by ;. In a path a pad name is that pad's centre, name@x,y a point inside that pad or via, vN(x,y) a via of type N, cw(c..) or ccw(c..) an arc to the next point about the centre after c; other vN are vias at no path point)
BAT_AN: C10.2 R12.2 T1.2 U2.22 | length 31.8
  Top Layer w0.254: U2.22 19.012,8.47 19.012,9.466 19.45,9.904 19.45,10.263 19.769,10.582 19.769,12.385 20.534,13.15 20.45,13.234 20.65,13.434 v1(20.65,14.15) ; T1.2 22.08,29.37 22.25,29.2 R12.2 22.45,29.15 C10.2 26.081,29.15 28.05,27.181 28.05,22.549 27.305,21.804 27.305,19.305 v1(26.75,18.75)
  Bottom Layer w0.254: v1(20.65,14.15) 22.2,14.15 22.175,14.175 v1(26.75,18.75)
BAT_MON_EN: R10.1 U2.45 | length 15.6
  Top Layer w0.254: U2.45 14.17,21.995 14.756,22.582 14.756,23.982 16.454,25.679 17.721,25.679 18.471,24.929 18.471,22.079 18.7,21.85 20.2,21.85 20.727,22.377 20.727,22.527 20.9,22.7 R10.1
BOOT0: R1.1 U2.43 | length 2.2
  Top Layer w0.254: R1.1@15.75,21.5 15.77,21.48 U2.43
DIO2: R5.2 U2.40 | length 13.6
  Top Layer w0.254: v1(17.1,23.929) 17.147,23.882 17.147,23.708 17.181,23.674 17.181,21.864 18.17,20.875 U2.40 ; R5.2 23.65,25.05 v1(23.65,25.3)
  Bottom Layer w0.254: v1(17.1,23.929) 20.879,23.929 22.25,25.3 v1(23.65,25.3)
GND: C1.1 C2.1 C3.1 C4.1 C5.1 C6.1 C7.1 C9.1 C10.1 C11.1 C12.1 CON1.5 D1.1 L1.1 L2.1 L3.1 P1.9 P1.10 P1.11 P1.12 P2.4 P3.1 R1.2 R11.1 R12.1 S1.4 U1.1 U1.2 U1.3 U1.4 U1.5 U1.10 U1.11 U1.12 U1.20 U1.22 U2.3 U2.7 U2.25 U2.27 U2.44 U2.49 U2.50 U2.51 U2.52 U2.53 U2.54 U2.55 U2.56 U2.57 U3.2 U4.0 U4.1 | length 15.5
  Top Layer w0.254: U2.25 21.95,9.582 21.043,9.582 v1(20.721,9.904) 20.725,9.908 v1(20.725,10.658) 21.036,10.968 21.957,10.968 U2.27
  Top Layer w0.3: U4.1 8.25,24.3 8.5,24.05
  Top Layer w0.6: U4.0 8.6,21.75 9,21.35 C12.1 ; C1.1 27.1,24.926 C2.1
  Bottom Layer w0.3: U1.4 18.12,21.75 U1.5 ; CON1.5 CON1.5 21.221,32.551 22.321,32.551 22.547,32.776 v1(24.575,32.776)
  Bottom Layer w0.6: U1.1 U1.2